# Altium PCB 拼板.PcbDoc
Units mm, origin at the board's own origin, x right, y up, seen from the top; angles counter-clockwise.
Board outline 97.92 x 97.28 mm, 2 copper layers (Top Layer, Bottom Layer); 149 components, 41 nets, 524 pads, 114 vias.
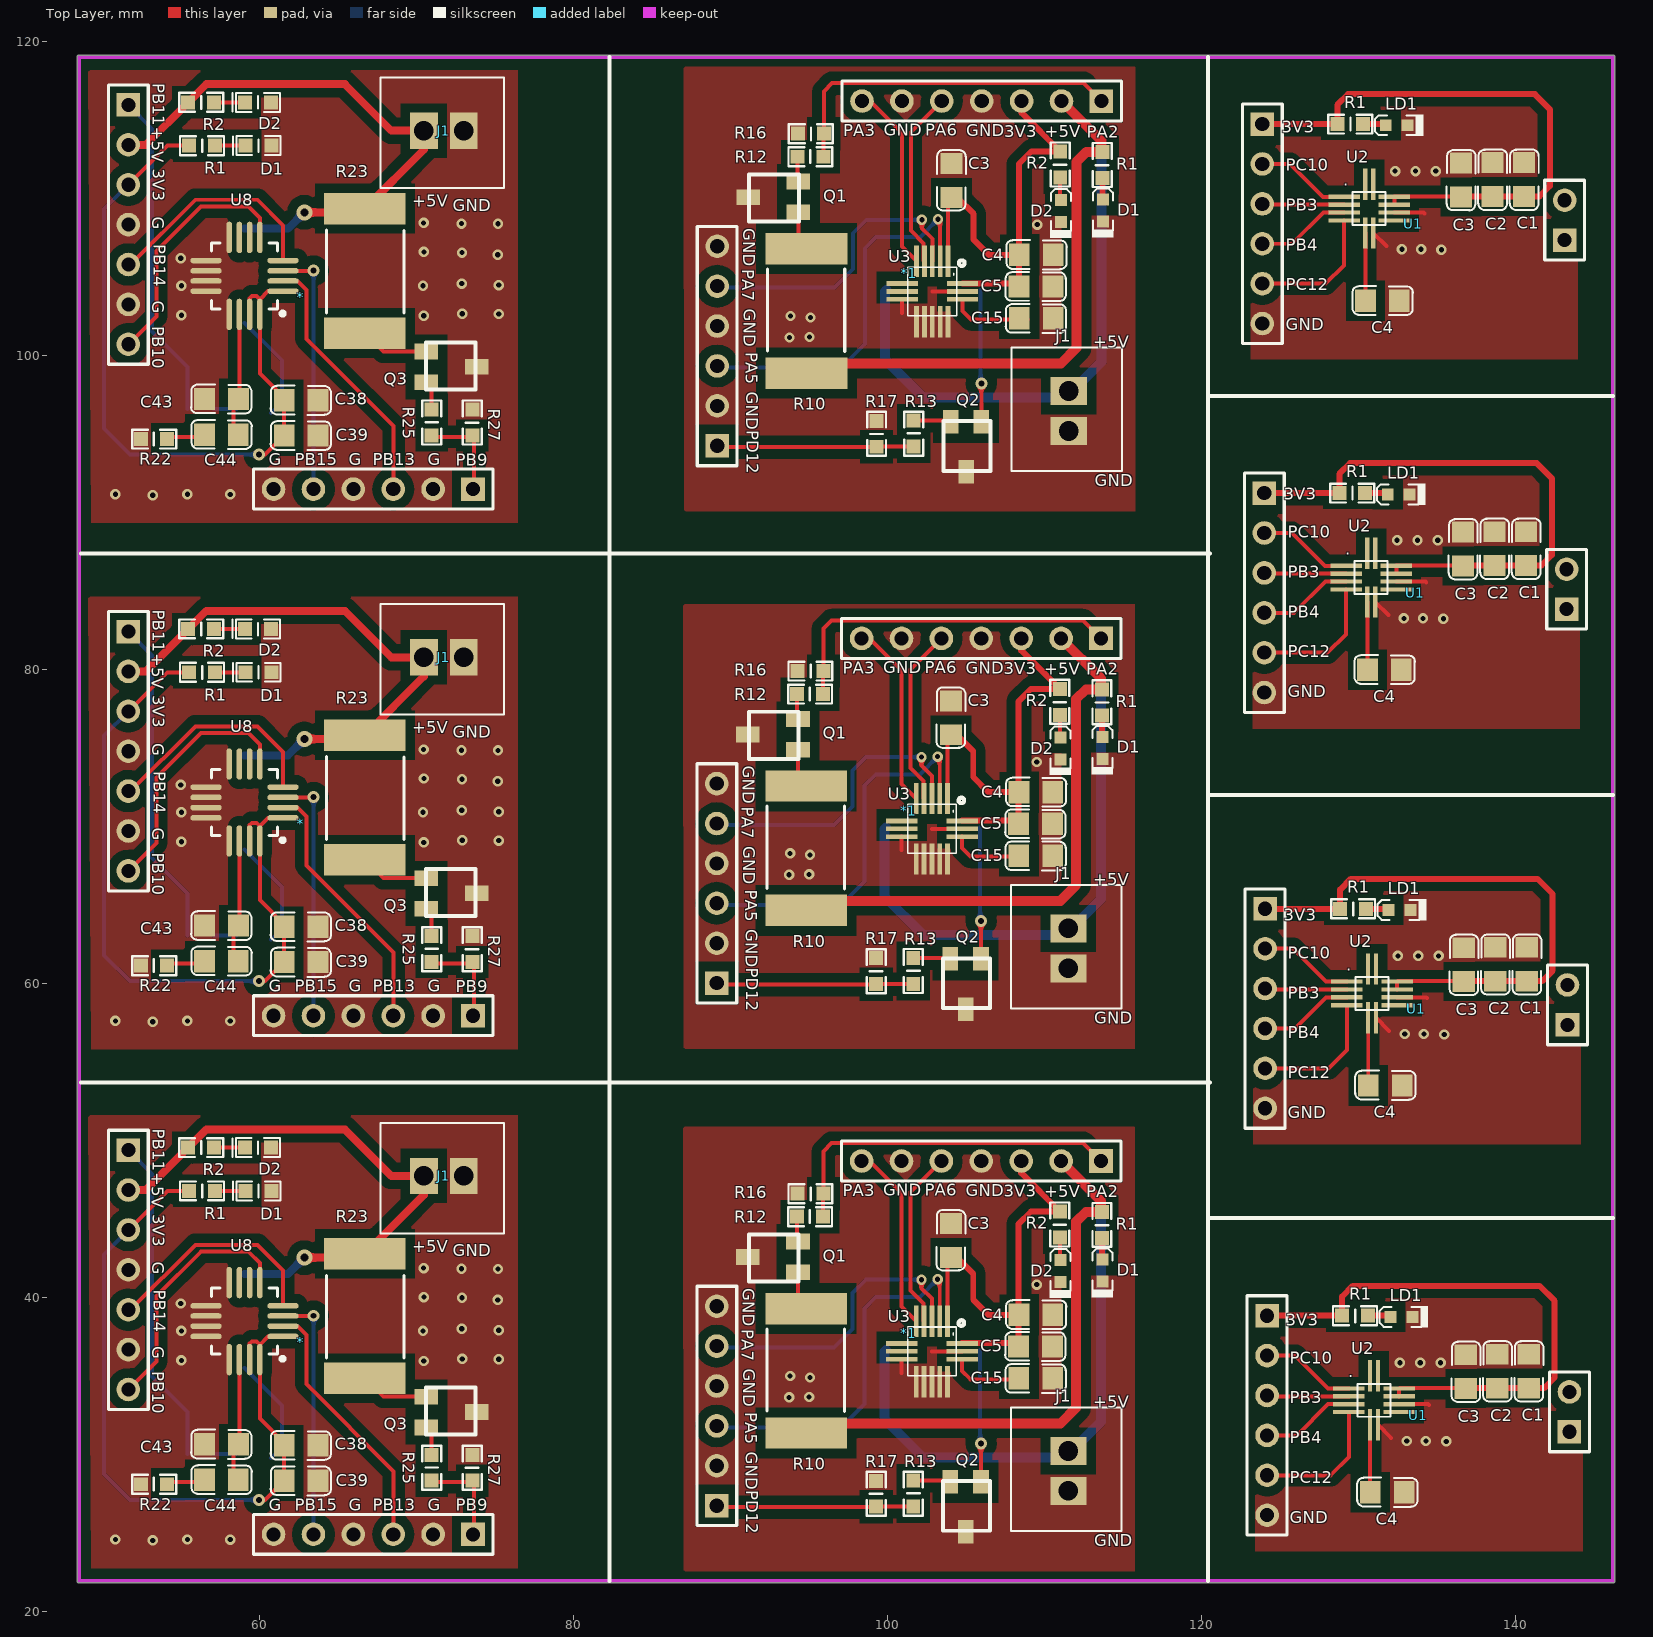
[diagram p0: Top Layer view]
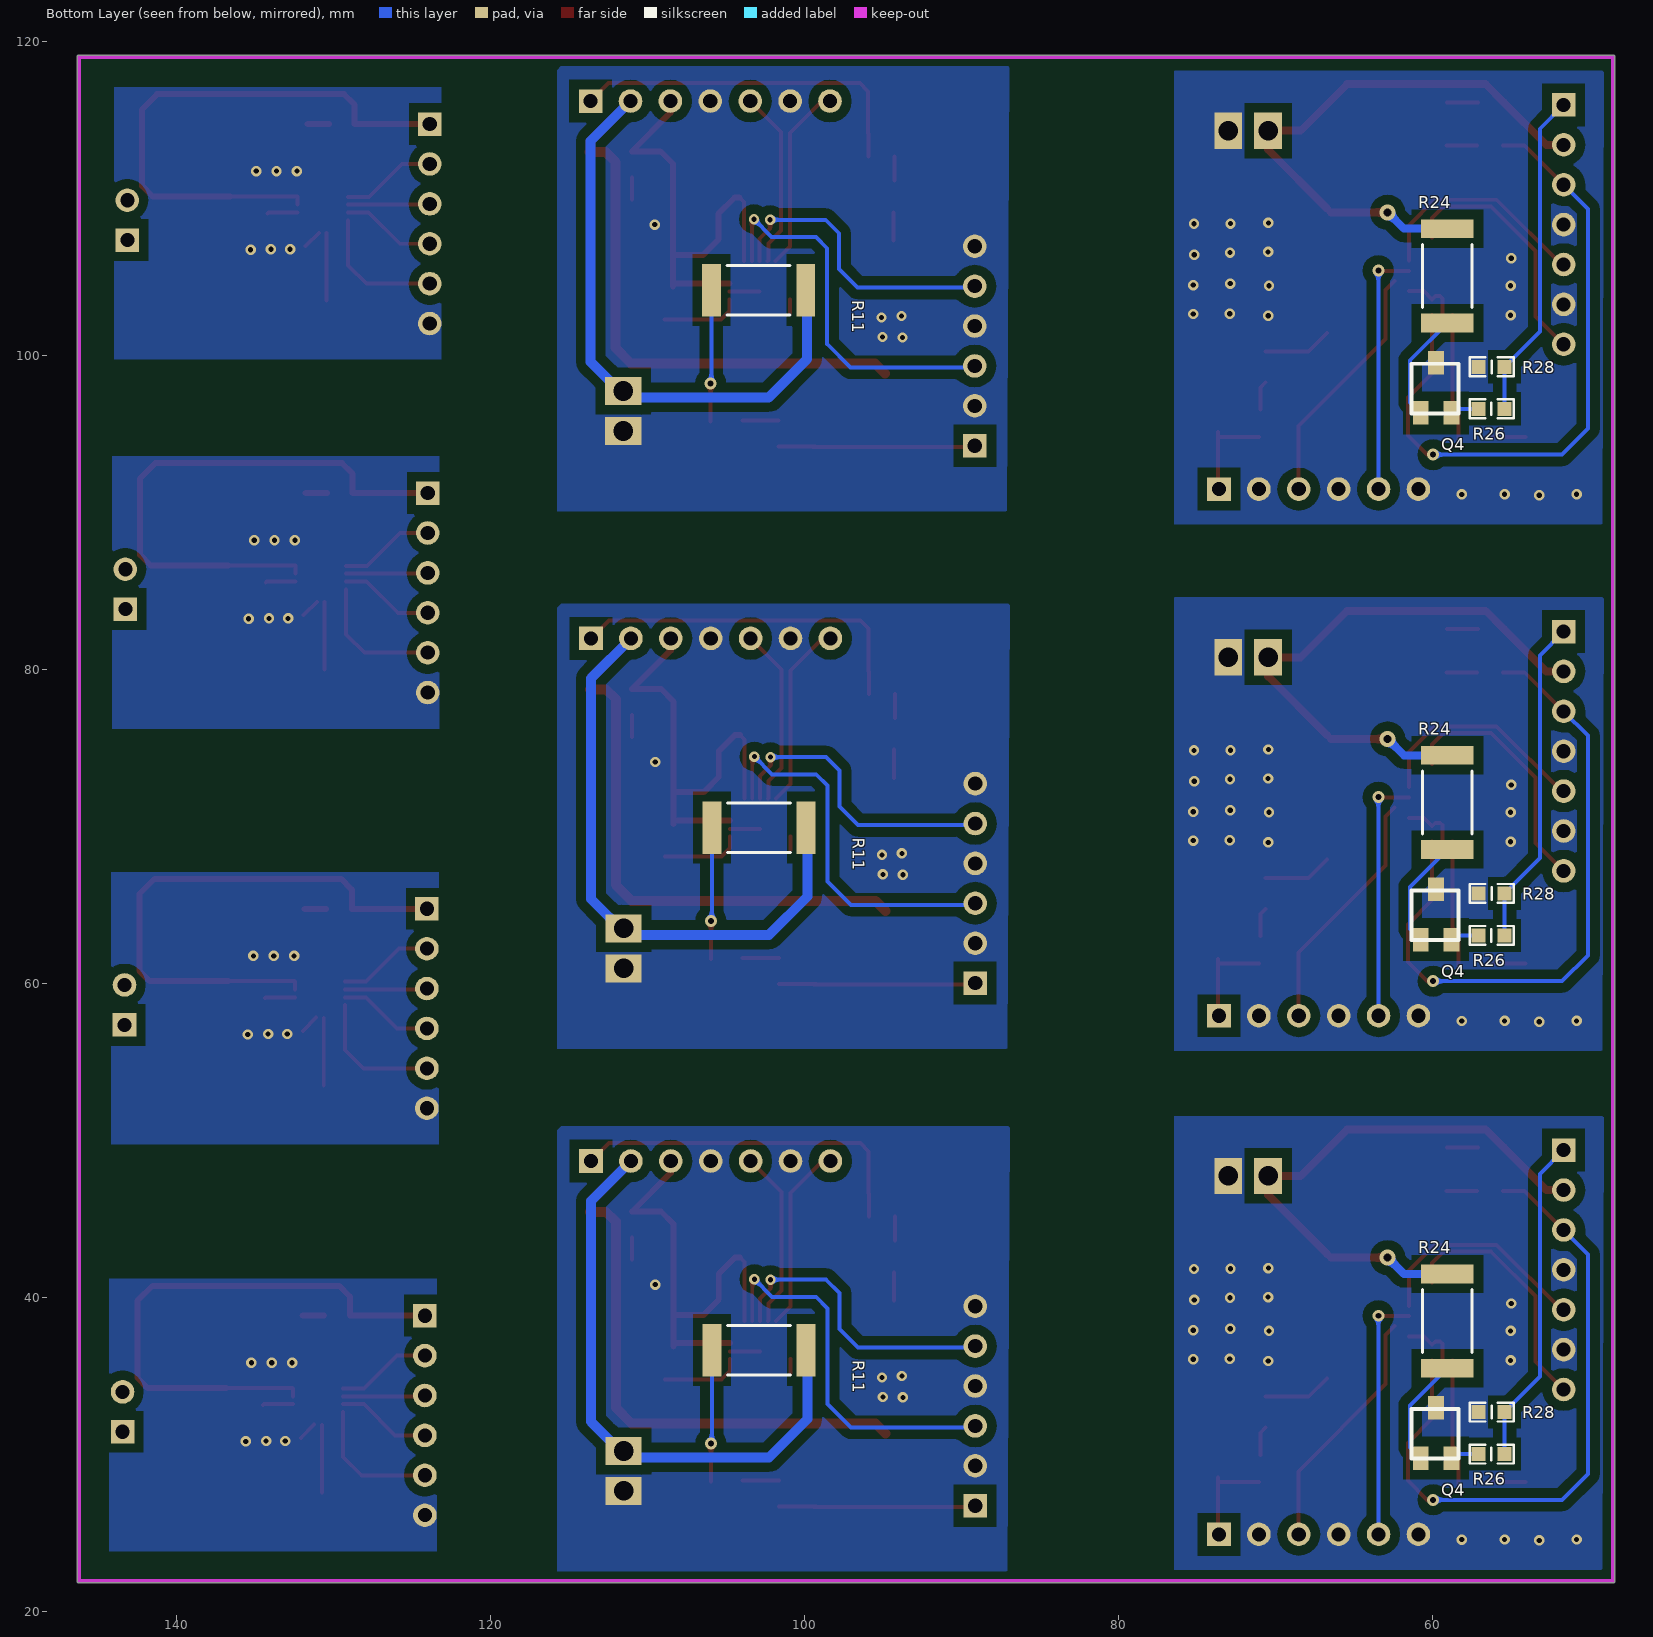
[diagram p1: Bottom Layer view, seen from below]

## Layer stack, top to bottom
Top Solder: solder mask 0.0102, Solder Resist, Dk 3.5
Top Layer: signal copper 0.0356
Dielectric 1: dielectric 0.32, FR-4, Dk 4.8
Bottom Layer: signal copper 0.0356
Bottom Solder: solder mask 0.0102, Solder Resist, Dk 3.5

## Board outline
48.387,21.971 ccw(c48.514,21.971) 48.514,21.844 146.177,21.844 ccw(c146.177,21.971) 146.304,21.971 146.304,118.999 ccw(c146.177,118.999) 146.177,119.126 48.514,119.126 ccw(c48.514,118.999) 48.387,118.999

## Design rules (kind name [scope] priority, off if disabled: settings)
Clearance [All] p1: gap=0.178
HoleToHoleClearance [All] p1: gap=0 allowstackedmicrovias=TRUE
PlaneClearance [All] p1: clearance=0.61
PolygonConnect [All] p1: connectstyle=Relief reliefconductorwidth=0.254 reliefentries=4 polygonreliefangle="90 Angle" airgapwidth=0.254
RoutingVias [All] p1: holewidth=0.711 width=1.27 viastyle="Through Hole" minholewidth=0.279 minwidth=0.279 maxholewidth=0.711 maxwidth=1.27
SilkToSilkClearance [All] p1: silktosilkclearance=0
SilkToSolderMaskClearance [IsPad] p1: minsilkscreentomaskgap=0 clearancetoexposedcopper=TRUE
SolderMaskExpansion [All] p1: expansion=0.254
Width [All] p1: maxlimit=1.27 minlimit=0.254 preferedwidth=0.254
26 further rules are at their usual default settings.

## Components (designator, comment, footprint, x,y, rotation, side; value= is the part's Value field where it differs from the comment)
* "mems小板底座" mems小板底座 54.192,24.002 r270 top
* "mems小板底座" mems小板底座 54.192,57.022 r270 top
* "mems小板底座" mems小板底座 54.192,90.55 r270 top
*1 "mems小板底座" mems小板底座 88.18,46.169 r180 top
*1 "mems小板底座" mems小板底座 88.18,79.443 r180 top
*1 "mems小板底座" mems小板底座 88.205,113.657 r180 top
C1 "104" C-0805c 141.503,113.182 r270 top
C1 "104" C-0805c 141.63,89.687 r270 top
C1 "104" C-0805c 141.681,63.221 r270 top
C1 "104" C-0805c 141.808,37.313 r270 top
C2 "104" C-0805c 139.497,113.182 r270 top
C2 "104" C-0805c 139.624,89.687 r270 top
C2 "104" C-0805c 139.675,63.221 r270 top
C2 "104" C-0805c 139.802,37.313 r270 top
C3 "103" C-0805C 103.049,41.667 r90 top
C3 "103" C-0805C 103.049,74.941 r90 top
C3 "103" C-0805C 103.075,109.155 r90 top
C3 "106" C-0805C 137.49,113.157 r270 top
C3 "106" C-0805C 137.617,89.662 r270 top
C3 "106" C-0805C 137.668,63.195 r270 top
C3 "106" C-0805C 137.795,37.287 r270 top
C4 "104" C-0805C 107.453,39.904 r0 top
C4 "104" C-0805C 107.453,73.178 r0 top
C4 "104" C-0805C 107.478,107.392 r0 top
C4 "220nf" C-0805C 129.515,104.47 r0 top
C4 "220nf" C-0805C 129.642,80.975 r0 top
C4 "220nf" C-0805C 129.692,54.508 r0 top
C4 "220nf" C-0805C 129.819,28.6 r0 top
C5 "2.2uf" C-0805C 111.398,35.919 r180 top
C5 "2.2uf" C-0805C 111.398,69.193 r180 top
C5 "2.2uf" C-0805C 111.424,103.406 r180 top
C15 "0.47uf" C-0805C 111.414,33.887 r180 top
C15 "0.47uf" C-0805C 111.414,67.161 r180 top
C15 "0.47uf" C-0805C 111.44,101.374 r180 top
C38 "104" C-0805C 64.635,29.623 r180 top
C38 "104" C-0805C 64.635,62.643 r180 top
C38 "104" C-0805C 64.635,96.171 r180 top
C39 "104" C-0805C 64.635,27.37 r180 top
C39 "104" C-0805C 64.635,60.39 r180 top
C39 "104" C-0805C 64.635,93.918 r180 top
C43 "104" C-0805C 59.57,29.698 r180 top
C43 "104" C-0805C 59.57,62.718 r180 top
C43 "104" C-0805C 59.57,96.246 r180 top
C44 "104" C-0805C 55.592,29.4 r0 top
C44 "104" C-0805C 55.592,62.42 r0 top
C44 "104" C-0805C 55.592,95.948 r0 top
D1 "" D-0603D#1 58.464,47.479 r0 top
D1 "" D-0603D#1 58.464,80.499 r0 top
D1 "" D-0603D#1 58.464,114.027 r0 top
D1 "" D-0603D#2 113.671,41.731 r0 top (schematic designator LD1)
D1 "" D-0603D#2 113.671,75.005 r0 top (schematic designator LD1)
D1 "" D-0603D#2 113.696,109.219 r0 top (schematic designator LD1)
D2 "1N4148" D-0603D#1 58.42,50.236 r0 top
D2 "1N4148" D-0603D#1 58.42,83.256 r0 top
D2 "1N4148" D-0603D#1 58.42,116.784 r0 top
D2 "" D-0603D#2 110.997,41.701 r0 top (schematic designator LD2)
D2 "" D-0603D#2 110.997,74.975 r0 top (schematic designator LD2)
D2 "" D-0603D#2 111.022,109.189 r0 top (schematic designator LD2)
J1 "J-2PIN" J-2-2.54-xh 74.352,47.687 r180 top
J1 "J-2PIN" J-2-2.54-xh 74.352,80.707 r180 top
J1 "J-2PIN" J-2-2.54-xh 74.352,114.235 r180 top
J1 "J-2PIN" J-2-2.54-xh 111.428,26.359 r90 top
J1 "J-2PIN" J-2-2.54-xh 111.428,59.633 r90 top
J1 "J-2PIN" J-2-2.54-xh 111.453,93.847 r90 top
LD1 "" D-0603D#2 132.41,114.656 r90 top
LD1 "" D-0603D#2 132.537,91.161 r90 top
LD1 "" D-0603D#2 132.588,64.694 r90 top
LD1 "" D-0603D#2 132.715,38.786 r90 top
Q1 "S8050" SOT-233-3 93.755,42.339 r90 top
Q1 "S8050" SOT-233-3 93.755,75.613 r90 top
Q1 "S8050" SOT-233-3 93.78,109.827 r90 top
Q2 "S8050" SOT-233-3 105.228,27.769 r180 top
Q2 "S8050" SOT-233-3 105.228,61.043 r180 top
Q2 "S8050" SOT-233-3 105.253,95.257 r180 top
Q3 "S8050" SOT-233-3 71.159,32.99 r270 top
Q3 "S8050" SOT-233-3 71.159,66.01 r270 top
Q3 "S8050" SOT-233-3 71.159,99.538 r270 top
Q4 "S8050" SOT-233-3 60.039,30.324 r180 bottom
Q4 "S8050" SOT-233-3 60.039,63.344 r180 bottom
Q4 "S8050" SOT-233-3 60.039,96.872 r180 bottom
R1 "Value" R-0603R 54.883,47.444 r0 top
R1 "Value" R-0603R 54.883,80.464 r0 top
R1 "Value" R-0603R 54.883,113.992 r0 top
R1 "1K" R-0603R 114.272,46.099 r270 top
R1 "1K" R-0603R 114.272,79.373 r270 top
R1 "1K" R-0603R 114.298,113.587 r270 top
R1 "510R" R-0603R 127.991,115.367 r0 top
R1 "510R" R-0603R 128.118,91.872 r0 top
R1 "510R" R-0603R 128.168,65.405 r0 top
R1 "510R" R-0603R 128.295,39.497 r0 top
R2 "Value" R-0603R 54.825,50.201 r0 top
R2 "Value" R-0603R 54.825,83.221 r0 top
R2 "Value" R-0603R 54.825,116.749 r0 top
R2 "510R" R-0603R 111.596,46.129 r270 top
R2 "510R" R-0603R 111.596,79.403 r270 top
R2 "510R" R-0603R 111.621,113.617 r270 top
R10 "30欧 2512" R-3925R（锰铜） 94.984,35.531 r270 top
R10 "30欧 2512" R-3925R（锰铜） 94.984,68.805 r270 top
R10 "30欧 2512" R-3925R（锰铜） 95.01,103.019 r270 top
R11 "30欧 2512" PCBComponent_1 102.719,36.533 r0 bottom
R11 "30欧 2512" PCBComponent_1 102.719,69.807 r0 bottom
R11 "30欧 2512" PCBComponent_1 102.745,104.021 r0 bottom
R12 "330欧" R-0603R 96.518,44.529 r180 top
R12 "330欧" R-0603R 96.518,77.803 r180 top
R12 "330欧" R-0603R 96.543,112.017 r180 top
R13 "330欧" R-0603R 100.991,26.076 r90 top
R13 "330欧" R-0603R 100.991,59.35 r90 top
R13 "330欧" R-0603R 101.017,93.564 r90 top
R16 "10K" R-0603R 93.621,47.266 r0 top
R16 "10K" R-0603R 93.621,80.54 r0 top
R16 "10K" R-0603R 93.647,114.753 r0 top
R17 "10K" R-0603R 99.903,28.986 r270 top
R17 "10K" R-0603R 99.903,62.26 r270 top
R17 "10K" R-0603R 99.928,96.474 r270 top
R22 "10K" R-0603R 54.754,27.494 r180 top
R22 "10K" R-0603R 54.754,60.514 r180 top
R22 "10K" R-0603R 54.754,94.042 r180 top
R23 "30欧 2512" R-3925R（锰铜） 66.537,38.661 r90 top
R23 "30欧 2512" R-3925R（锰铜） 66.537,71.681 r90 top
R23 "30欧 2512" R-3925R（锰铜） 66.537,105.209 r90 top
R24 "30欧 2512" PCBComponent_1 58.924,38.686 r270 bottom
R24 "30欧 2512" PCBComponent_1 58.924,71.706 r270 bottom
R24 "30欧 2512" PCBComponent_1 58.924,105.234 r270 bottom
R25 "330欧" R-0603R 70.329,27.72 r90 top
R25 "330欧" R-0603R 70.329,60.74 r90 top
R25 "330欧" R-0603R 70.329,94.268 r90 top
R26 "330欧" R-0603R 54.782,29.417 r0 bottom
R26 "330欧" R-0603R 54.782,62.437 r0 bottom
R26 "330欧" R-0603R 54.782,95.965 r0 bottom
R27 "10K" R-0603R 74.189,30.641 r270 top
R27 "10K" R-0603R 74.189,63.661 r270 top
R27 "10K" R-0603R 74.189,97.189 r270 top
R28 "10K" R-0603R 57.703,33.363 r180 bottom
R28 "10K" R-0603R 57.703,66.383 r180 bottom
R28 "10K" R-0603R 57.703,99.911 r180 bottom
U1 "J-6PIN" LSM底座 127.66,107.569 r0 top
U1 "J-6PIN" LSM底座 127.787,84.074 r0 top
U1 "J-6PIN" LSM底座 127.838,57.607 r0 top
U1 "J-6PIN" LSM底座 127.965,31.699 r0 top
U2 "LSM303AGR" LSM电子罗盘 130.658,109.347 r0 top
U2 "LSM303AGR" LSM电子罗盘 130.785,85.852 r0 top
U2 "LSM303AGR" LSM电子罗盘 130.835,59.385 r0 top
U2 "LSM303AGR" LSM电子罗盘 130.962,33.477 r0 top
U3 "ICM-20608-G" ICM20608-G 102.815,36.59 r270 top
U3 "ICM-20608-G" ICM20608-G 102.815,69.864 r270 top
U3 "ICM-20608-G" ICM20608-G 102.84,104.078 r270 top
U8 "I3G4250D" I3G4250D 59.456,38.238 r180 top
U8 "I3G4250D" I3G4250D 59.456,71.258 r180 top
U8 "I3G4250D" I3G4250D 59.456,104.786 r180 top

## Footprints (in the part's own frame and the unit in brackets; to place one, negate y for a bottom-side part, rotate by r counter-clockwise, add the part's x,y. Pads: shape width x height; smd on the part's side, far side on the other; paste and mask are expansions set on the pad)
C-0805c [mil]
  rect 52x56 smd: 1(35.6,-38.84) 2(120.6,-38.84)
  silkscreen extent 3,-75 155,-2, body extent 38,-62 116,-14, height 37
C-0805C [mil]
  rect 52x56 smd: 1(35.6,-38.84) 2(120.6,-38.84)
  silkscreen extent 3,-75 155,-2, body extent 38,-62 116,-14, height 37
D-0603D#1 [mil]
  rect 35x35 smd: 1(25.62,-26.4) 2(90.62,-26.4)
  silkscreen extent -6,-50 113,-3, body extent 3,-50 113,-3, height 10
D-0603D#2 [mil]
  rect 30x30 smd: 1(0,27.5) 2(0,-27.5)
  silkscreen extent -27,-67 27,55, body extent -15,-39 15,38, height 12
I3G4250D [mm]
  oval 2x0.35 smd: 1(-2.044,0.696) 2(-2.044,0.046) 3(-2.044,-0.604) 4(-2.044,-1.254) 9(2.856,-1.254) 10(2.856,-0.604) 11(2.856,0.046) 12(2.856,0.696)
  oval 0.35x2 smd: 5(-0.569,-2.729) 6(0.081,-2.729) 7(0.731,-2.729) 8(1.381,-2.729) 13(1.381,2.171) 14(0.731,2.171) 15(0.081,2.171) 16(-0.569,2.171)
  silkscreen extent -2.14,-2.38 2.51,2.25, body extent -1.67,-2.35 2.48,1.8, height 1.1
ICM20608-G [mm]
  rect 2x0.3 smd: 1(-1.925,1) 2(-1.925,0.5) 3(-1.925,0) 4(-1.925,-0.5) 5(-1.925,-1) 9(1.925,-1) 10(1.925,-0.5) 11(1.925,0) 12(1.925,0.5) 13(1.925,1)
  rect 0.3x2 smd: 6(-0.5,-1.925) 7(0,-1.925) 8(0.5,-1.925) 14(0.5,1.925) 15(0,1.925) 16(-0.5,1.925)
  silkscreen extent -1.98,-1.55 1.55,2.06
J-2-2.54-xh [mil]
  rect 70x90.75 hole 49.21: 1(53,-3) 2(153,-3)
  silkscreen extent -48,-136 262,141, body extent -44,-124 248,116, height 293
LSM底座 [mm]
  rect 1.5x1.5 hole 0.9: 1(-3.81,7.163) 8(15.443,-0.229)
  round 1.5 hole 0.9: 2(-3.81,4.623) 3(-3.81,2.083) 4(-3.81,-0.457) 5(-3.81,-2.997) 6(-3.81,-5.537) 7(15.443,2.311)
  silkscreen extent -5.08,-6.81 16.71,8.43, body extent -5.08,-6.86 16.74,8.38, height 10.1
LSM电子罗盘 [mm]
  rect 2x0.275 smd: 1(-1.6,0.75) 2(-1.6,0.25) 3(-1.6,-0.25) 4(-1.6,-0.75) 7(1.6,-0.75) 8(1.6,-0.25) 9(1.6,0.25) 10(1.6,0.75)
  rect 0.275x2 smd: 5(-0.25,-1.55) 6(0.25,-1.55) 11(0.25,1.55) 12(-0.25,1.55)
  silkscreen extent -1.05,-1.05 1.05,1.05
mems小板底座 [mm]
  rect 1.5x1.5 hole 0.9: 1(-25.4,-2.54) 13(-0.94,19.406)
  round 1.5 hole 0.9: 2(-22.86,-2.54) 3(-20.32,-2.54) 4(-17.78,-2.54) 5(-15.24,-2.54) 6(-12.7,-2.54) 7(-10.16,-2.54) 8(-0.94,6.706) 9(-0.94,9.246) 10(-0.94,11.786) 11(-0.94,14.326) 12(-0.94,16.866)
  silkscreen extent -26.67,-3.81 0.33,20.68, body extent -26.64,-3.78 0.33,20.62, height 10.1
PCBComponent_1 [mm]
  rect 1.2x3.35 smd: 1(3.166,-0.132) 2(-2.834,-0.132)
  silkscreen extent -1.83,-1.71 2.17,1.44, body extent -3.01,-1.74 3.34,1.48, height 0.65
R-0603R [mil]
  rect 35x35 smd: 1(25,-25) 2(90,-25)
  silkscreen extent 2,-49 113,-1, body extent 24,-40 87,-9, height 15
R-3925R（锰铜） [mm]
  rect 2x5.2 smd: 1(-3.785,-0.178) 2(4.14,-0.178)
  silkscreen extent -2.49,-2.67 2.77,2.26, body extent -3.52,-2.6 4.43,2.25, height 0.38
SOT-233-3 [mm]
  rect 1x1.5 smd: 1(-0.711,-0.533) 2(1.245,-0.533) 3(0.254,2.667)
  silkscreen extent -1.3,-0.56 1.7,2.6, body extent -1.25,-0.22 1.65,2.58, height 1.2

## Part data
C1 C1 C1 C1 C2 C2 C2 C2 C3 C3 C3 C3 C4 C4 C4 C4 C4 C4 C4: library part Cap, "Capacitor"
C3 C3 C3 C5 C5 C5 C15 C15 C15 C38 C38 C38 C39 C39 C39 C43 C43 C43 C44 C44 C44: library part C-贴片电容, "Capacitor"
D1 D1 D1 D2 D2 D2: library part D-发光二极管, "Default Diode"
D1 D1 D1 D2 D2 D2 LD1 LD1 LD1 LD1: library part LED
J1 J1 J1 J1 J1 J1: "SOCKET"
Q1 Q1 Q1 Q2 Q2 Q2 Q3 Q3 Q3 Q4 Q4 Q4: library part NPN, "NPN Bipolar Transistor"
R1 R1 R1 R2 R2 R2: library part Resistor-1, "Resistor"
R1 R1 R1 R1 R1 R1 R1 R2 R2 R2: library part Resistor, "RES, 10K, 5%, 0.1 W, 0603"
R10 R10 R10 R11 R11 R11 R12 R12 R12 R13 R13 R13 R16 R16 R16 R17 R17 R17 R23 R23 R23 R24 R24 R24 R25 R25 R25 R26 R26 R26 R27 R27 R27 R28 R28 R28: library part "Res Semi", "Semiconductor Resistor"
R22 R22 R22: library part Resistor
U2 U2 U2 U2: "e-compass"
U8 U8 U8: "gyroscope"

## Via types
v1: diameter 0.66, hole 0.33, Top Layer to Bottom Layer, 102 vias
v2: diameter 0.762, hole 0.381, Top Layer to Bottom Layer, 9 vias
v3: diameter 1.016, hole 0.508, Top Layer to Bottom Layer, 3 vias

## Nets (pads, with @x,y where several pads share a name; then routed paths per layer and width w, separated by ;. In a path a pad name is that pad's centre, name@x,y a point inside that pad or via, vN(x,y) a via of type N, cw(c..) or ccw(c..) an arc to the next point about the centre after c; other vN are vias at no path point)
3.3V: 
3V3: 
+5V: 
+5V_OUT: 
CS_MAG: 
CS_XL: 
GND: 
NetC4_1: 
NetC15_2: 
NetC43_1: 
NetC44_1: 
NetD1_1: 
NetD2_1: 
NetLD1_1: 
NetLD2_1: 
NetQ1_1: 
NetQ1_2: 
NetQ2_1: 
NetQ2_2: 
NetQ3_1: 
NetQ3_2: 
NetQ4_1: 
NetQ4_2: 
PA3: 
PA5: 
PA6: 
PA7: 
PA8: 
PA9: 
PB3: 
PB4: 
PB9: 
PB10: 
PB11: 
PB13: 
PB14: 
PB15: 
PC10: 
PC12: 
SCL: 
SD: 
pads on no net: *1.1 *1.2 *1.3 *1.4 *1.5 *1.6 *1.7 *1.8 *1.9 *1.10 *1.11 *1.12 *1.13 *.1 *.2 *.3 *.4 *.5 *.6 *.7 *.8 *.9 *.10 *.11 *.12 *.13 C1.1 C1.2 C2.1 C2.2 C3.1 C3.2 C4.1 C4.2 C5.1 C5.2 C15.1 C15.2 C38.1 C38.2 C39.1 C39.2 C43.1 C43.2 C44.1 C44.2 D1.1 D1.2 D2.1 D2.2 J1.1 J1.2 LD1.1 LD1.2 Q1.1 Q1.2 Q1.3 Q2.1 Q2.2 Q2.3 Q3.1 Q3.2 Q3.3 Q4.1 Q4.2 Q4.3 R1.1 R1.2 R2.1 R2.2 R10.1 R10.2 R11.1 R11.2 R12.1 R12.2 R13.1 R13.2 R16.1 R16.2 R17.1 R17.2 R22.1 R22.2 R23.1 R23.2 R24.1 R24.2 R25.1 R25.2 R26.1 R26.2 R27.1 R27.2 R28.1 R28.2 U1.1 U1.2 U1.3 U1.4 U1.5 U1.6 U1.7 U1.8 U2.1 U2.2 U2.3 U2.4 U2.5 U2.6 U2.7 U2.8 U2.9 U2.10 U2.11 U2.12 U3.1 U3.2 U3.3 U3.4 U3.5 U3.6 U3.7 U3.8 U3.9 U3.10 U3.11 U3.12 U3.13 U3.14 U3.15 U3.16 U8.1 U8.2 U8.3 U8.4 U8.5 U8.6 U8.7 U8.8 U8.9 U8.10 U8.11 U8.12 U8.13 U8.14 U8.15 U8.16
copper on no net: | length 1571.6
  Top Layer w0.254: 51.652,34.162 53.434,35.944 53.434,40.103 56.265,42.933 59.298,42.933 60.024,42.207 60.024,40.967 ; 51.652,44.322 54.139,46.809 55.518,46.809 ; 51.652,67.182 53.434,68.964 53.434,73.123 56.265,75.953 59.298,75.953 60.024,75.227 60.024,73.987 ; 51.652,77.342 54.139,79.829 55.518,79.829 ; 51.652,100.71 53.434,102.492 53.434,106.651 56.265,109.481 59.298,109.481 60.024,108.755 60.024,107.515 ; 51.652,110.87 54.139,113.357 55.518,113.357 ; 51.74,39.186 55.919,43.365 59.869,43.365 61.499,41.735 61.499,39.492 ; 51.74,72.206 55.919,76.385 59.869,76.385 61.499,74.755 61.499,72.512 ; 51.74,105.734 55.919,109.913 59.869,109.913 61.499,108.283 61.499,106.04 ; 54.068,28.264 56.241,28.264 ; 54.068,61.284 56.241,61.284 ; 54.068,94.812 56.241,94.812 ; 57.111,49.566 59.071,49.566 ; 57.111,82.586 59.071,82.586 ; 57.111,116.114 59.071,116.114 ; 57.169,46.809 59.115,46.809 ; 57.169,79.829 59.115,79.829 ; 57.169,113.357 59.115,113.357 ; 58.335,27.926 58.335,30.186 ; 58.335,60.946 58.335,63.206 ; 58.335,94.474 58.335,96.734 ; 58.345,30.196 58.348,30.196 58.717,30.566 58.717,36.02 ; 58.345,63.216 58.348,63.216 58.717,63.586 58.717,69.04 ; 58.345,96.744 58.348,96.744 58.717,97.114 58.717,102.568 ; 59.374,36.067 59.374,37.086 59.514,37.226 59.811,37.226 60.024,37.013 60.554,37.542 61.499,37.542 ; 59.374,69.087 59.374,70.106 59.514,70.246 59.811,70.246 60.024,70.033 60.554,70.562 61.499,70.562 ; 59.374,102.615 59.374,103.634 59.514,103.774 59.811,103.774 60.024,103.561 60.554,104.09 61.499,104.09 ; v2(59.968,27.138) 60.353,27.138 61.572,28.357 61.572,30.61 61.572,30.764 60.024,32.311 60.024,36.02 ; v2(59.968,60.158) 60.353,60.158 61.572,61.377 61.572,63.63 61.572,63.784 60.024,65.331 60.024,69.04 ; v2(59.968,93.686) 60.353,93.686 61.572,94.905 61.572,97.158 61.572,97.312 60.024,98.859 60.024,102.568 ; 61.499,38.842 63.465,38.842 v2(63.45,38.858) ; 61.499,71.862 63.465,71.862 v2(63.45,71.878) ; 61.499,105.39 63.465,105.39 v2(63.45,105.406) ; 62.434,38.192 62.997,37.63 62.997,34.504 68.545,28.955 68.545,24.746 ; 62.434,71.212 62.997,70.65 62.997,67.524 68.545,61.975 68.545,57.766 ; 62.434,104.74 62.997,104.178 62.997,101.052 68.545,95.503 68.545,91.294 ; 66.715,34.876 67.89,33.701 70.626,33.701 ; 66.715,67.896 67.89,66.721 70.626,66.721 ; 66.715,101.424 67.89,100.249 70.626,100.249 ; 70.626,31.745 70.964,31.408 70.964,30.006 ; 70.626,64.765 70.964,64.428 70.964,63.026 ; 70.626,98.293 70.964,97.956 70.964,96.554 ; 71.055,28.264 73.462,28.264 ; 71.055,61.284 73.462,61.284 ; 71.055,94.812 73.462,94.812 ; 73.666,25.01 73.666,28.567 ; 73.666,58.03 73.666,61.587 ; 73.666,91.558 73.666,95.115 ; 88.853,26.668 99.424,26.668 ; 88.853,59.942 99.424,59.942 ; 88.878,94.156 99.45,94.156 ; 94.232,43.64 94.232,45.164 ; 94.232,76.914 94.232,78.438 ; 94.257,111.128 94.257,112.652 ; 94.288,39.834 94.288,41.628 ; 94.288,73.108 94.288,74.902 ; 94.314,107.322 94.314,109.115 ; 95.883,45.164 95.883,46.606 ; 95.883,78.438 95.883,79.88 ; 95.907,46.631 95.907,49.326 96.435,49.854 112.435,49.854 113.58,48.709 ; 95.907,79.905 95.907,82.6 96.435,83.128 112.435,83.128 113.58,81.983 ; 95.908,112.652 95.908,114.094 ; 95.933,114.118 95.933,116.814 96.46,117.342 112.46,117.342 113.605,116.197 ; 98.34,48.709 98.849,48.709 100.877,46.681 100.877,39.452 101.815,38.515 ; 98.34,81.983 98.849,81.983 100.877,79.955 100.877,72.726 101.815,71.789 ; 98.365,116.197 98.875,116.197 100.903,114.169 100.903,106.94 101.84,106.003 ; 99.268,26.7 101.615,26.7 ; 99.268,59.974 101.615,59.974 ; 99.293,94.188 101.641,94.188 ; 100.89,35.226 100.89,36.09 ; 100.89,68.5 100.89,69.364 ; 100.915,102.714 100.915,103.578 ; 101.626,28.362 103.923,28.362 ; 101.626,61.636 103.923,61.636 ; 101.652,95.85 103.949,95.85 ; v1(102.15,41.151) 102.15,40.607 102.814,39.943 102.814,38.515 ; v1(102.15,74.425) 102.15,73.881 102.814,73.217 102.814,71.789 ; v1(102.176,108.639) 102.176,108.095 102.84,107.43 102.84,106.003 ; 102.314,38.515 102.269,38.56 102.269,39.641 101.448,40.462 101.448,46.737 103.42,48.709 ; 102.314,71.789 102.269,71.834 102.269,72.915 101.448,73.736 101.448,80.011 103.42,81.983 ; 102.34,106.003 102.295,106.048 102.295,107.129 101.474,107.95 101.474,114.225 103.445,116.197 ; 102.817,36.59 104.74,36.59 ; 102.817,69.864 104.74,69.864 ; 102.843,104.078 104.765,104.078 ; v1(103.179,41.186) 103.313,41.186 103.314,41.184 103.314,38.515 ; v1(103.179,74.46) 103.313,74.46 103.314,74.458 103.314,71.789 ; v1(103.205,108.674) 103.338,108.674 103.34,108.672 103.34,106.003 ; 103.814,38.515 103.814,42.281 104.105,42.571 ; 103.814,71.789 103.814,75.555 104.105,75.845 ; 103.84,106.003 103.84,109.768 104.131,110.059 ; 104.74,36.09 104.74,35.354 105.279,34.815 108.877,34.815 ; 104.74,69.364 104.74,68.628 105.279,68.089 108.877,68.089 ; 104.765,103.578 104.765,102.842 105.304,102.302 108.902,102.302 ; 105.939,28.302 105.939,30.709 v2(105.944,30.714) ; 105.939,61.576 105.939,63.983 v2(105.944,63.988) ; 105.964,95.79 105.964,98.197 v2(105.97,98.202) ; 110.961,42.436 110.961,43.843 ; 110.961,75.71 110.961,77.117 ; 110.986,109.924 110.986,111.331 ; 123.85,104.572 127.889,104.572 129.057,105.74 129.057,108.597 ; 123.85,107.112 125.755,107.112 127.741,109.097 129.058,109.097 ; 123.85,112.192 125.628,112.192 127.723,110.097 129.058,110.097 ; 123.905,109.597 129.058,109.597 ; 123.977,81.077 128.016,81.077 129.184,82.245 129.184,85.102 ; 123.977,83.617 125.882,83.617 127.868,85.602 129.185,85.602 ; 123.977,88.697 125.755,88.697 127.85,86.602 129.185,86.602 ; 124.028,54.61 128.067,54.61 129.235,55.778 129.235,58.635 ; 124.028,57.15 125.933,57.15 127.918,59.135 129.235,59.135 ; 124.028,62.23 125.806,62.23 127.901,60.135 129.235,60.135 ; 124.032,86.102 129.185,86.102 ; 124.083,59.635 129.235,59.635 ; 124.155,28.702 128.194,28.702 129.362,29.87 129.362,32.727 ; 124.155,31.242 126.06,31.242 128.045,33.227 129.362,33.227 ; 124.155,36.322 125.933,36.322 128.028,34.227 129.362,34.227 ; 124.21,33.727 129.362,33.727 ; 130.419,103.484 130.419,107.786 ; 130.546,79.989 130.546,84.291 ; 130.597,53.522 130.597,57.824 ; 130.724,27.614 130.724,31.916 ; 130.908,107.797 130.912,107.797 131.75,106.959 ; 131.035,84.302 131.039,84.302 131.877,83.464 ; 131.085,57.835 131.09,57.835 131.928,56.998 ; 131.212,31.927 131.217,31.927 132.055,31.09 ; 132.258,109.097 134.108,109.097 134.163,109.042 ; 132.258,109.597 132.258,110.097 ; 132.28,110.119 136.529,110.119 ; 132.385,85.602 134.235,85.602 134.29,85.547 ; 132.385,86.102 132.385,86.602 ; 132.407,86.624 136.656,86.624 ; 132.435,59.135 134.286,59.135 134.341,59.08 ; 132.435,59.635 132.435,60.135 ; 132.457,60.157 136.707,60.157 ; 132.562,33.227 134.413,33.227 134.468,33.172 ; 132.562,33.727 132.562,34.227 ; 132.584,34.249 136.834,34.249
  Top Layer w0.381: 104.105,42.571 104.408,42.571 105.448,41.532 105.448,39.883 106.413,38.918 108.335,38.918 ; 104.105,75.845 104.408,75.845 105.448,74.806 105.448,73.157 106.413,72.192 108.335,72.192 ; 104.131,110.059 104.434,110.059 105.473,109.02 105.473,107.371 106.438,106.406 108.36,106.406 ; 104.74,37.108 108.176,37.108 ; 104.74,70.382 108.176,70.382 ; 104.765,104.596 108.202,104.596 ; 108.335,36.905 108.335,38.918 ; 108.335,70.179 108.335,72.192 ; 108.36,104.393 108.36,106.406 ; 108.5,48.709 108.5,47.955 110.961,45.494 109.122,45.494 108.335,44.707 108.335,38.918 ; 108.5,81.983 108.5,81.229 110.961,78.768 109.122,78.768 108.335,77.981 108.335,72.192 ; 108.525,116.197 108.525,115.443 110.986,112.982 109.148,112.982 108.36,112.195 108.36,106.406 ; 113.637,42.463 113.637,43.813 ; 113.637,75.737 113.637,77.087 ; 113.663,109.951 113.663,111.301 ; 123.85,114.732 128.626,114.732 128.626,115.951 129.311,116.637 141.199,116.637 142.164,115.672 142.164,110.795 141.488,110.119 140.517,110.119 138.51,110.119 136.529,110.119 ; 123.977,91.237 128.753,91.237 128.753,92.456 129.438,93.142 141.326,93.142 142.291,92.177 142.291,87.3 141.615,86.624 140.644,86.624 138.637,86.624 136.656,86.624 ; 124.028,64.77 128.803,64.77 128.803,65.989 129.489,66.675 141.376,66.675 142.342,65.71 142.342,60.833 141.666,60.157 140.695,60.157 138.688,60.157 136.707,60.157 ; 124.155,38.862 128.93,38.862 128.93,40.081 129.616,40.767 141.503,40.767 142.469,39.802 142.469,34.925 141.793,34.249 140.822,34.249 138.815,34.249 136.834,34.249 ; 130.277,114.732 131.636,114.732 ; 130.404,91.237 131.762,91.237 ; 130.454,64.77 131.813,64.77 ; 130.581,38.862 131.94,38.862
  Top Layer w0.508: 51.652,46.862 52.756,46.862 55.46,49.566 56.619,50.724 65.437,50.724 68.398,47.763 70.466,47.763 70.466,46.552 66.715,42.801 ; 51.652,79.882 52.756,79.882 55.46,82.586 56.619,83.744 65.437,83.744 68.398,80.783 70.466,80.783 70.466,79.572 66.715,75.821 ; 51.652,113.41 52.756,113.41 55.46,116.114 56.619,117.272 65.437,117.272 68.398,114.311 70.466,114.311 70.466,113.1 66.715,109.349 ; v3(62.859,42.56) 66.473,42.56 ; v3(62.859,75.58) 66.473,75.58 ; v3(62.859,109.108) 66.473,109.108
  Top Layer w0.635: 94.832,31.365 95.468,32.002 111.002,32.002 111.998,32.998 111.998,44.845 112.617,45.464 113.637,45.464 ; 94.832,64.639 95.468,65.276 111.002,65.276 111.998,66.272 111.998,78.119 112.617,78.738 113.637,78.738 ; 94.857,98.853 95.494,99.49 111.027,99.49 112.023,100.485 112.023,112.332 112.643,112.952 113.663,112.952 ; 111.04,48.709 113.58,46.169 113.58,45.522 ; 111.04,81.983 113.58,79.443 113.58,78.796 ; 111.065,116.197 113.605,113.657 113.605,113.009
  Bottom Layer w0.254: 51.652,44.322 50.101,42.77 50.101,28.788 51.751,27.138 v2(59.968,27.138) ; 51.652,49.402 53.169,47.885 53.169,34.976 55.417,32.728 55.417,30.052 ; 51.652,77.342 50.101,75.79 50.101,61.808 51.751,60.158 v2(59.968,60.158) ; 51.652,82.422 53.169,80.905 53.169,67.996 55.417,65.748 55.417,63.072 ; 51.652,110.87 50.101,109.318 50.101,95.336 51.751,93.686 v2(59.968,93.686) ; 51.652,115.95 53.169,114.433 53.169,101.524 55.417,99.276 55.417,96.6 ; 57.068,30.052 58.533,30.052 ; 57.068,63.072 58.533,63.072 ; 57.068,96.6 58.533,96.6 ; 59.057,35.52 61.431,33.145 61.431,30.471 60.751,29.79 ; 59.057,68.54 61.431,66.165 61.431,63.491 60.751,62.81 ; 59.057,102.068 61.431,99.693 61.431,97.019 60.751,96.338 ; 63.437,24.941 63.45,24.954 v2(63.45,38.858) ; 63.437,57.961 63.45,57.974 v2(63.45,71.878) ; 63.437,91.489 63.45,91.502 v2(63.45,105.406) ; 88.853,31.748 97.028,31.748 98.515,33.235 98.515,39.331 99.241,40.056 102.05,40.056 v1(103.179,41.186) v1@103.27,41.186 ; 88.853,36.828 96.575,36.828 97.753,38.006 97.753,40.292 98.612,41.151 v1(102.15,41.151) ; 88.853,65.022 97.028,65.022 98.515,66.509 98.515,72.605 99.241,73.33 102.05,73.33 v1(103.179,74.46) v1@103.27,74.46 ; 88.853,70.102 96.575,70.102 97.753,71.28 97.753,73.566 98.612,74.425 v1(102.15,74.425) ; 88.878,99.236 97.053,99.236 98.54,100.723 98.54,106.818 99.266,107.544 102.075,107.544 v1(103.205,108.674) v1@103.296,108.674 ; 88.878,104.316 96.6,104.316 97.778,105.494 97.778,107.78 98.637,108.639 v1(102.176,108.639) ; v2@105.885,30.714 105.885,36.665 ; v2@105.885,63.988 105.885,69.939 ; v2@105.911,98.202 105.911,104.153
  Bottom Layer w0.508: 59.057,41.52 61.819,41.52 v3(62.859,42.56) ; 59.057,74.54 61.819,74.54 v3(62.859,75.58) ; 59.057,108.068 61.819,108.068 v3(62.859,109.108)
  Bottom Layer w0.635: 99.885,36.665 99.801,36.581 99.801,32.276 102.239,29.838 111.308,29.838 113.58,32.11 113.58,46.169 111.04,48.709 ; 99.885,69.939 99.801,69.855 99.801,65.55 102.239,63.112 111.308,63.112 113.58,65.384 113.58,79.443 111.04,81.983 ; 99.911,104.153 99.826,104.068 99.826,99.764 102.265,97.326 111.333,97.326 113.605,99.598 113.605,113.657 111.065,116.197
  other v1: 53.212,24.553 50.825,24.611 55.414,24.611 58.144,24.605 135.56,30.861 133.045,30.886 134.264,30.886 93.725,33.658 94.996,33.688 95.057,34.93 93.785,35.021 132.613,35.865 133.909,35.865 135.204,35.865 70.458,35.974 55.028,36.013 75.24,36.089 72.906,36.109 55.028,37.894 70.416,37.892 75.232,37.933 72.878,38.028 54.994,39.638 75.171,39.866 72.896,40.002 70.472,40.047 109.494,40.841 72.862,41.846 75.19,41.836 70.451,41.892 135.433,56.769 132.918,56.794 134.137,56.794 53.212,57.573 50.825,57.631 55.414,57.631 58.144,57.625 132.486,61.773 133.782,61.773 135.077,61.773 93.725,66.932 94.996,66.962 95.057,68.204 93.785,68.295 70.458,68.994 55.028,69.033 75.24,69.109 72.906,69.129 55.028,70.914 70.416,70.912 75.232,70.953 72.878,71.048 54.994,72.658 75.171,72.886 72.896,73.022 70.472,73.067 109.494,74.115 72.862,74.866 75.19,74.856 70.451,74.912 135.382,83.236 132.867,83.261 134.087,83.261 132.436,88.24 133.731,88.24 135.026,88.24 53.212,91.101 50.825,91.159 55.414,91.159 58.144,91.153 93.75,101.145 95.022,101.176 95.083,102.417 70.458,102.522 93.811,102.508 55.028,102.561 75.24,102.637 72.906,102.657 55.028,104.442 70.416,104.44 75.232,104.481 72.878,104.576 54.994,106.186 75.171,106.414 72.896,106.55 70.472,106.595 135.255,106.731 132.74,106.756 133.96,106.756 109.519,108.328 72.862,108.394 75.19,108.384 70.451,108.44 132.309,111.735 133.604,111.735 134.899,111.735

## Polygon pours and split planes (outlines as drawn)
no net on Bottom Layer "Top Layer-No Net" (solid, remove dead copper, pour order 188): 49.105,51.572 76.41,51.572 76.504,51.666 76.457,51.619 76.457,22.699 49.247,22.699 49.199,22.747
no net on Bottom Layer "Top Layer-No Net" (solid, remove dead copper, pour order 184): 49.105,84.592 76.41,84.592 76.504,84.686 76.457,84.639 76.457,55.719 49.247,55.719 49.199,55.767
no net on Bottom Layer "Top Layer-No Net" (solid, remove dead copper, pour order 180): 49.105,118.12 76.41,118.12 76.504,118.214 76.457,118.167 76.457,89.247 49.247,89.247 49.199,89.295
no net on Bottom Layer "Top Layer-No Net" (solid, remove dead copper, pour order 178): 86.914,50.914 115.478,50.914 115.557,50.835 115.716,50.676 115.716,22.589 87.151,22.589 87.072,22.509
no net on Bottom Layer "Top Layer-No Net" (solid, remove dead copper, pour order 174): 86.914,84.188 115.478,84.188 115.557,84.109 115.716,83.95 115.716,55.863 87.151,55.863 87.072,55.783
no net on Bottom Layer "Top Layer-No Net" (solid, remove dead copper, pour order 170): 86.939,118.402 115.503,118.402 115.582,118.323 115.741,118.164 115.741,90.076 87.177,90.076 87.097,89.997
no net on Bottom Layer "Bottom Layer-No Net" (solid, remove dead copper, pour order 18): 122.377,117.805 144.678,117.805 144.678,99.009 122.377,99.009
no net on Bottom Layer "Bottom Layer-No Net" (solid, remove dead copper, pour order 22): 122.504,94.31 144.805,94.31 144.805,75.514 122.504,75.514
no net on Bottom Layer "Bottom Layer-No Net" (solid, remove dead copper, pour order 30): 122.555,67.843 144.856,67.843 144.856,49.047 122.555,49.047
no net on Bottom Layer "Bottom Layer-No Net" (solid, remove dead copper, pour order 34): 122.682,41.935 144.983,41.935 144.983,23.139 122.682,23.139
no net on Top Layer "Top Layer-No Net" (solid, remove dead copper, pour order 190): 49.105,51.572 49.152,51.619 76.457,51.619 76.457,22.842 76.552,22.747 76.504,22.794 49.294,22.794
no net on Top Layer "Top Layer-No Net" (solid, remove dead copper, pour order 186): 49.105,84.592 49.152,84.639 76.457,84.639 76.457,55.862 76.552,55.767 76.504,55.814 49.294,55.814
no net on Top Layer "Top Layer-No Net" (solid, remove dead copper, pour order 182): 49.105,118.12 49.152,118.167 76.457,118.167 76.457,89.39 76.552,89.295 76.504,89.342 49.294,89.342
no net on Top Layer "Top Layer-No Net" (solid, remove dead copper, pour order 176): 86.984,50.881 115.711,50.881 115.739,50.909 115.739,22.599 87.123,22.599 87.012,22.488
no net on Top Layer "Top Layer-No Net" (solid, remove dead copper, pour order 172): 86.984,84.155 115.711,84.155 115.739,84.183 115.739,55.873 87.123,55.873 87.012,55.762
no net on Top Layer "Top Layer-No Net" (solid, remove dead copper, pour order 168): 87.009,118.369 115.736,118.369 115.764,118.397 115.764,90.087 87.148,90.087 87.037,89.976
no net on Top Layer "Bottom Layer-No Net" (solid, remove dead copper, pour order 16): 122.377,117.805 144.678,117.805 144.678,99.009 122.377,99.009
no net on Top Layer "Bottom Layer-No Net" (solid, remove dead copper, pour order 20): 122.504,94.31 144.805,94.31 144.805,75.514 122.504,75.514
no net on Top Layer "Bottom Layer-No Net" (solid, remove dead copper, pour order 28): 122.555,67.843 144.856,67.843 144.856,49.047 122.555,49.047
no net on Top Layer "Bottom Layer-No Net" (solid, remove dead copper, pour order 32): 122.682,41.935 144.983,41.935 144.983,23.139 122.682,23.139

## Keep-outs
Keep-Out Layer:
  lines w0.254: 48.514,21.971 48.514,118.999 146.177,118.999 146.177,21.971 48.514,21.971

## Silkscreen, mask and mechanical layers (free items; w line width, h text height)
Top Overlay:
  lines w0.254: 48.641,53.721 120.523,53.721 ; 48.641,87.376 120.523,87.376 ; 82.296,21.971 82.296,118.999 ; 120.396,21.971 120.396,118.999 ; 120.396,72.009 146.177,72.009 ; 120.396,97.409 146.177,97.409 ; 120.523,45.085 146.177,45.085
  text "PB11" at 53.203,117.327 h0.76 r270
  text "+5V" at 53.132,114.555 h0.76 r270
  text "3V3" at 125.095,114.173 h0.76
  text "GND" at 99.744,113.985 h0.76
  text "PA6" at 102.393,113.973 h0.76
  text "GND" at 104.989,113.959 h0.76
  text "PA3" at 97.168,113.943 h0.76
  text "3V3" at 107.414,113.908 h0.76
  text "+5V" at 110.004,113.884 h0.76
  text "PA2" at 112.665,113.876 h0.76
  text "3V3" at 53.213,111.883 h0.76 r270
  text "PC10" at 125.349,111.76 h0.76
  text "+5V" at 69.718,109.464 h0.76
  text "PB3" at 125.349,109.22 h0.76
  text "GND" at 72.313,109.184 h0.76
  text "G" at 53.166,108.845 h0.76 r270
  text "GND" at 90.805,108.103 h0.76 r270
  text "PB14" at 53.259,107.069 h0.76 r270
  text "PB4" at 125.349,106.68 h0.76
  text "PA7" at 90.744,105.481 h0.76 r270
  text "PC12" at 125.349,104.14 h0.76
  text "G" at 53.189,103.471 h0.76 r270
  text "GND" at 90.842,102.978 h0.76 r270
  text "PB10" at 53.166,101.859 h0.76 r270
  text "GND" at 125.349,101.6 h0.76
  text "+5V" at 113.102,100.479 h0.76
  text "PA5" at 90.954,100.188 h0.76 r270
  text "GND" at 90.98,97.674 h0.76 r270
  text "PD12" at 91.012,95.222 h0.76 r270
  text "G" at 60.578,93.005 h0.76
  text "PB15" at 62.243,93.003 h0.76
  text "G" at 65.684,93.003 h0.76
  text "PB13" at 67.203,93.003 h0.76
  text "G" at 70.727,93.005 h0.76
  text "PB9" at 72.496,92.991 h0.76
  text "GND" at 113.169,91.668 h0.76
  text "3V3" at 125.222,90.805 h0.76
  text "PC10" at 125.476,88.392 h0.76
  text "PB3" at 125.476,85.852 h0.76
  text "PB11" at 53.203,83.799 h0.76 r270
  text "PB4" at 125.476,83.312 h0.76
  text "+5V" at 53.132,81.027 h0.76 r270
  text "PC12" at 125.476,80.772 h0.76
  text "GND" at 99.719,79.772 h0.76
  text "PA6" at 102.367,79.759 h0.76
  text "GND" at 104.964,79.746 h0.76
  text "PA3" at 97.143,79.729 h0.76
  text "3V3" at 107.389,79.694 h0.76
  text "+5V" at 109.979,79.67 h0.76
  text "PA2" at 112.639,79.662 h0.76
  text "3V3" at 53.213,78.355 h0.76 r270
  text "GND" at 125.476,78.232 h0.76
  text "+5V" at 69.718,75.936 h0.76
  text "GND" at 72.313,75.656 h0.76
  text "G" at 53.166,75.317 h0.76 r270
  text "GND" at 90.779,73.889 h0.76 r270
  text "PB14" at 53.259,73.541 h0.76 r270
  text "PA7" at 90.719,71.267 h0.76 r270
  text "G" at 53.189,69.943 h0.76 r270
  text "GND" at 90.817,68.764 h0.76 r270
  text "PB10" at 53.166,68.331 h0.76 r270
  text "+5V" at 113.076,66.265 h0.76
  text "PA5" at 90.929,65.974 h0.76 r270
  text "3V3" at 125.222,64.008 h0.76
  text "GND" at 90.955,63.46 h0.76 r270
  text "PC10" at 125.476,61.595 h0.76
  text "PD12" at 90.986,61.008 h0.76 r270
  text "G" at 60.578,59.477 h0.76
  text "PB15" at 62.243,59.475 h0.76
  text "G" at 65.684,59.475 h0.76
  text "PB13" at 67.203,59.475 h0.76
  text "G" at 70.727,59.477 h0.76
  text "PB9" at 72.496,59.463 h0.76
  text "PB3" at 125.476,59.055 h0.76
  text "GND" at 113.144,57.454 h0.76
  text "PB4" at 125.476,56.515 h0.76
  text "PC12" at 125.476,53.975 h0.76
  text "GND" at 125.476,51.435 h0.76
  text "PB11" at 53.203,50.779 h0.76 r270
  text "+5V" at 53.132,48.007 h0.76 r270
  text "GND" at 99.719,46.498 h0.76
  text "PA6" at 102.367,46.485 h0.76
  text "GND" at 104.964,46.472 h0.76
  text "PA3" at 97.143,46.455 h0.76
  text "3V3" at 107.389,46.42 h0.76
  text "+5V" at 109.979,46.396 h0.76
  text "PA2" at 112.639,46.388 h0.76
  text "3V3" at 53.213,45.335 h0.76 r270
  text "+5V" at 69.718,42.916 h0.76
  text "GND" at 72.313,42.636 h0.76
  text "G" at 53.166,42.297 h0.76 r270
  text "GND" at 90.779,40.615 h0.76 r270
  text "PB14" at 53.259,40.521 h0.76 r270
  text "3V3" at 125.349,38.227 h0.76
  text "PA7" at 90.719,37.993 h0.76 r270
  text "G" at 53.189,36.923 h0.76 r270
  text "PC10" at 125.603,35.814 h0.76
  text "GND" at 90.817,35.49 h0.76 r270
  text "PB10" at 53.166,35.311 h0.76 r270
  text "PB3" at 125.603,33.274 h0.76
  text "+5V" at 113.076,32.991 h0.76
  text "PA5" at 90.929,32.7 h0.76 r270
  text "PB4" at 125.603,30.734 h0.76
  text "GND" at 90.955,30.186 h0.76 r270
  text "PC12" at 125.603,28.194 h0.76
  text "PD12" at 90.986,27.734 h0.76 r270
  text "G" at 60.578,26.457 h0.76
  text "PB15" at 62.243,26.455 h0.76
  text "G" at 65.684,26.455 h0.76
  text "PB13" at 67.203,26.455 h0.76
  text "G" at 70.727,26.457 h0.76
  text "PB9" at 72.496,26.443 h0.76
  text "GND" at 125.603,25.654 h0.76
  text "GND" at 113.144,24.18 h0.76